# Altium PCB PCA10ControlBoardV1.0.PcbDoc
Units mm, origin at the board's own origin, x right, y up, seen from the top; angles counter-clockwise.
Board outline 43.18 x 54.61 mm, 4 copper layers (Component Side, Ground Plane, Power Plane, Solder Side), stack 0.844 mm thick; 41 components, 31 nets, 179 pads, 204 vias.
Unrouted connection lines stored in the file: 2.
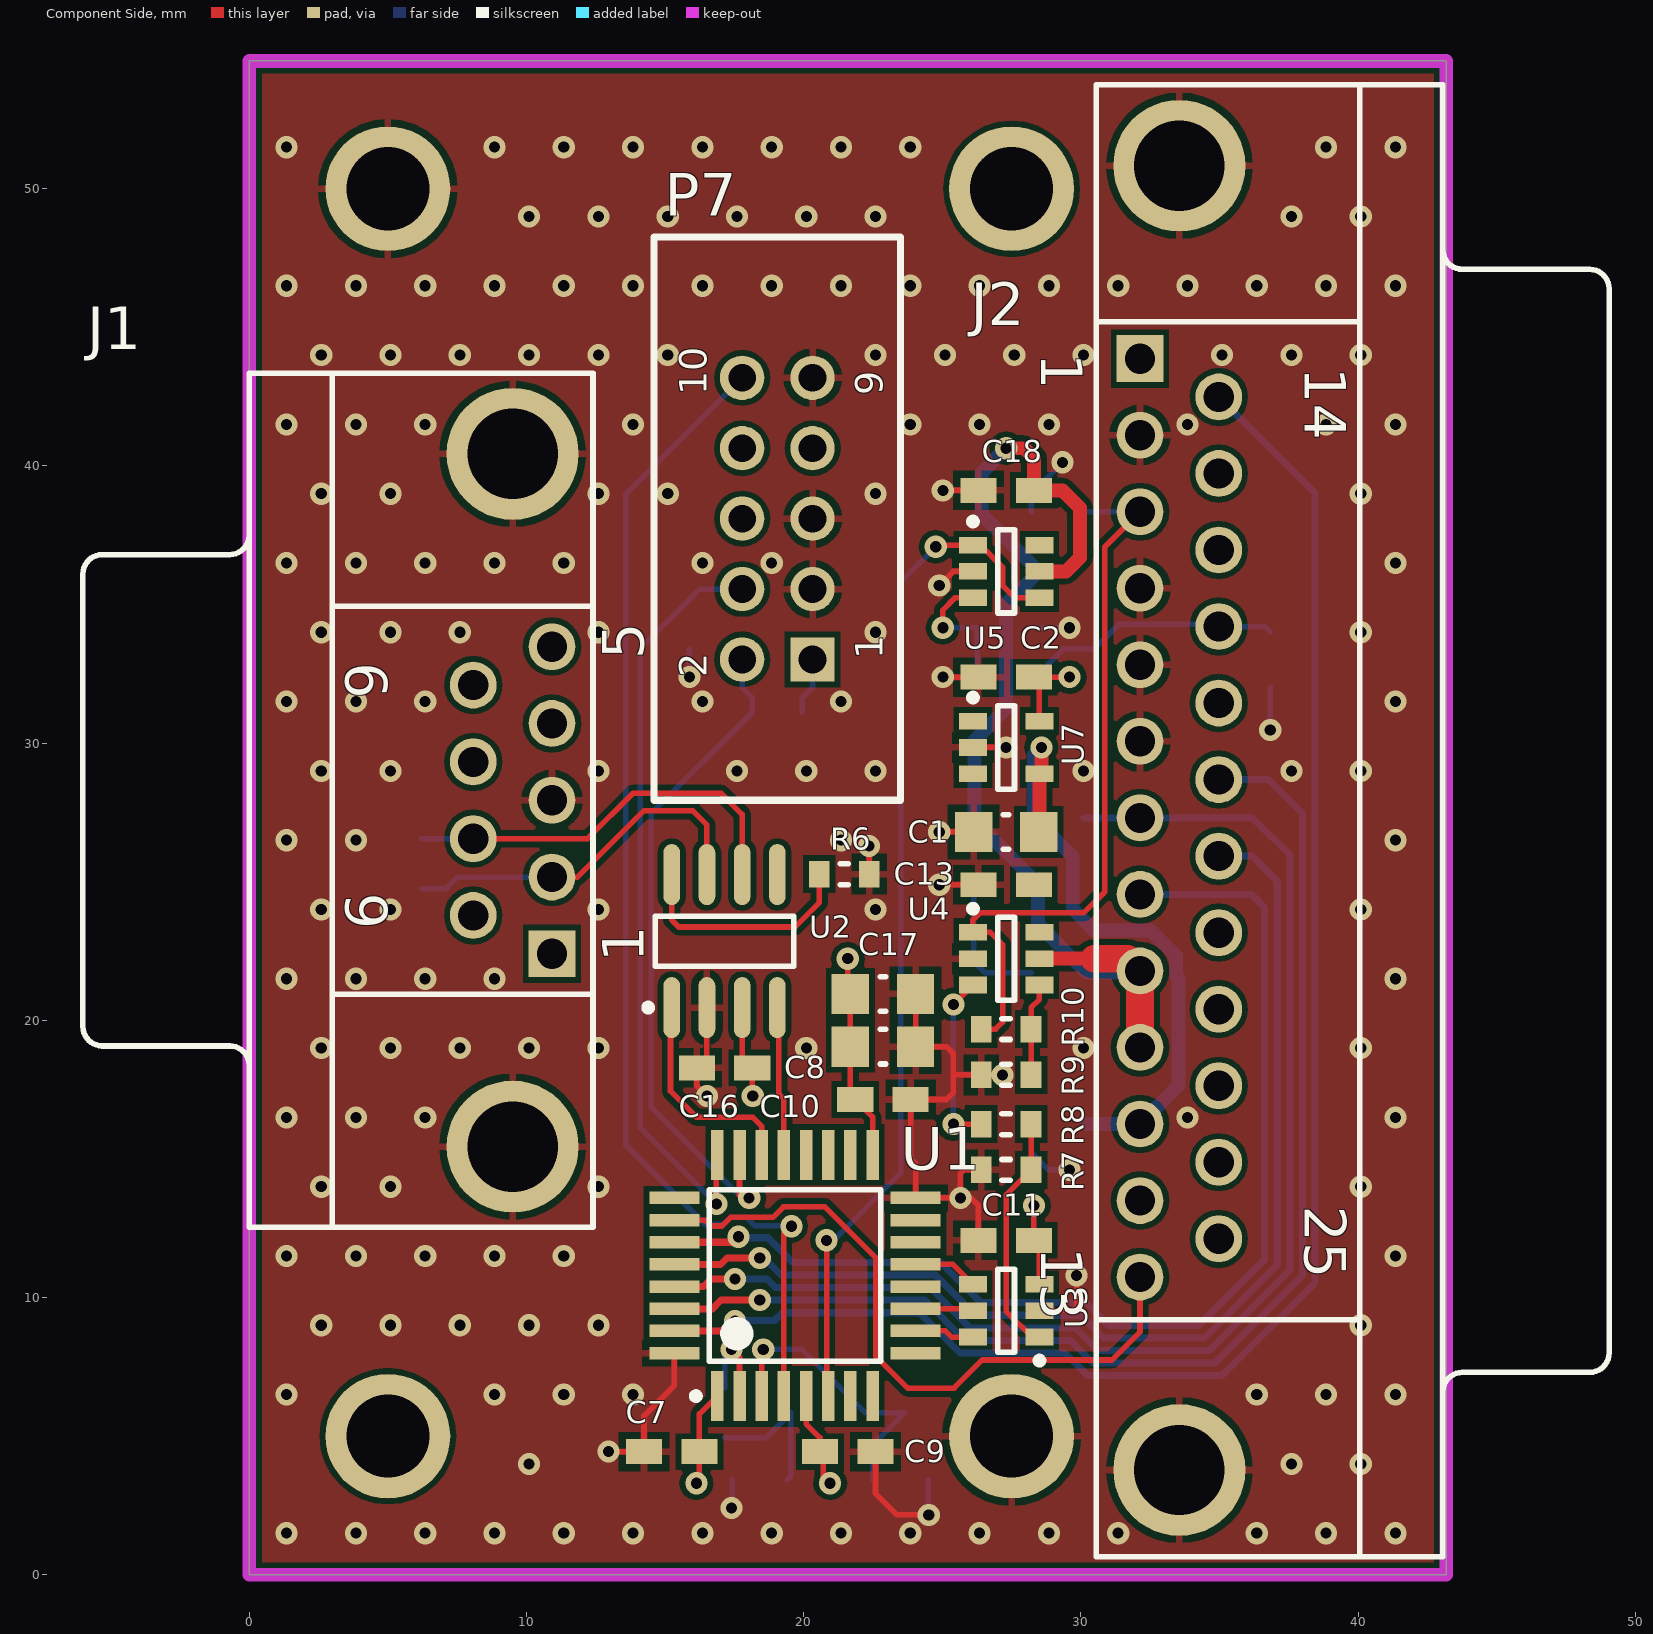
[diagram p0: Component Side view]
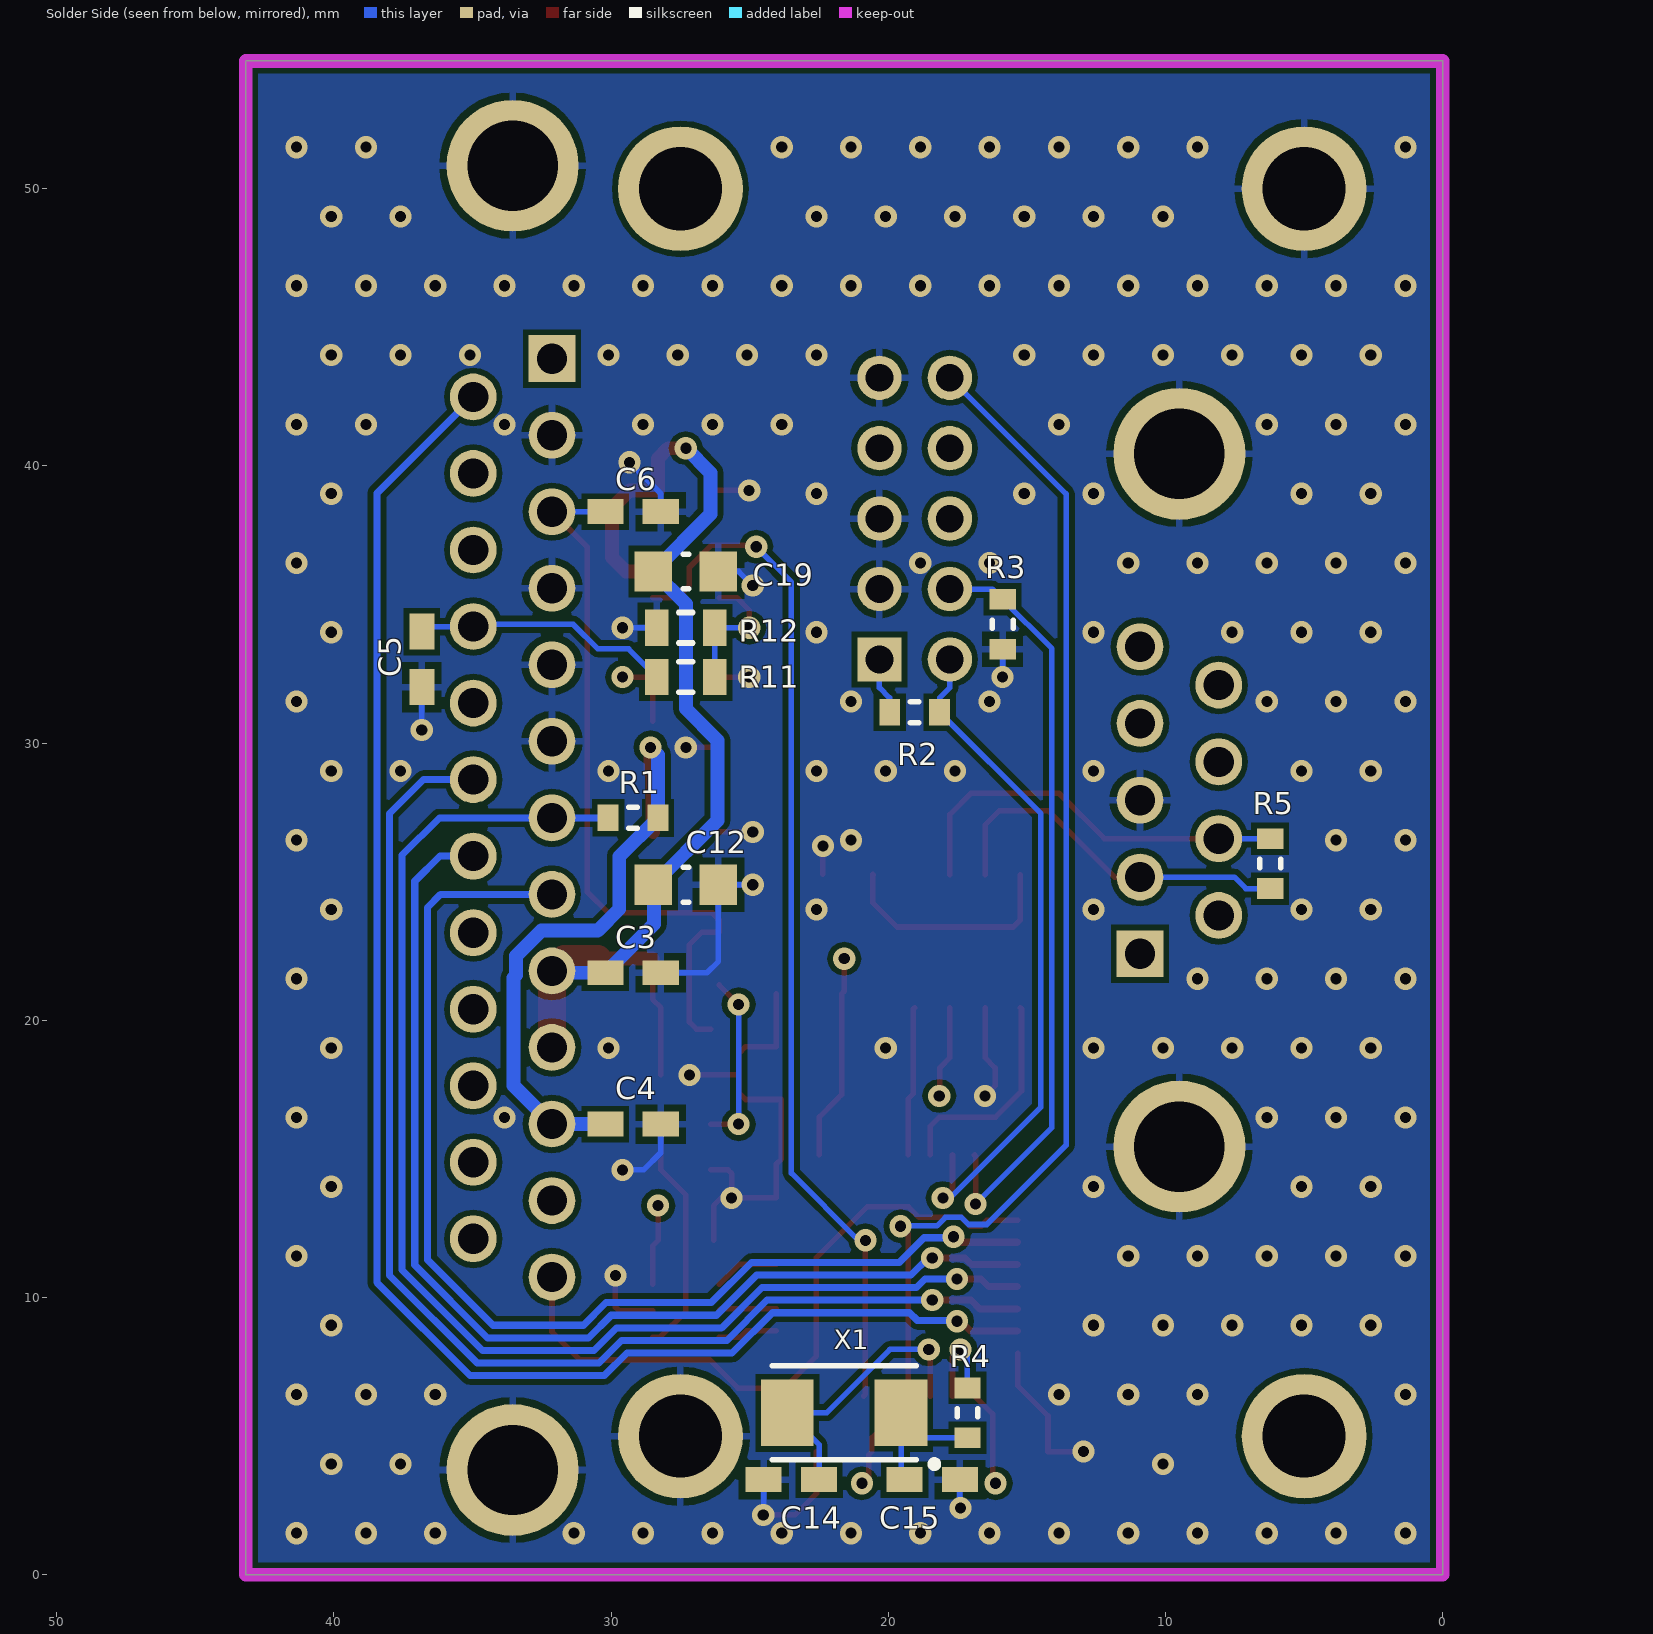
[diagram p1: Solder Side view, seen from below]
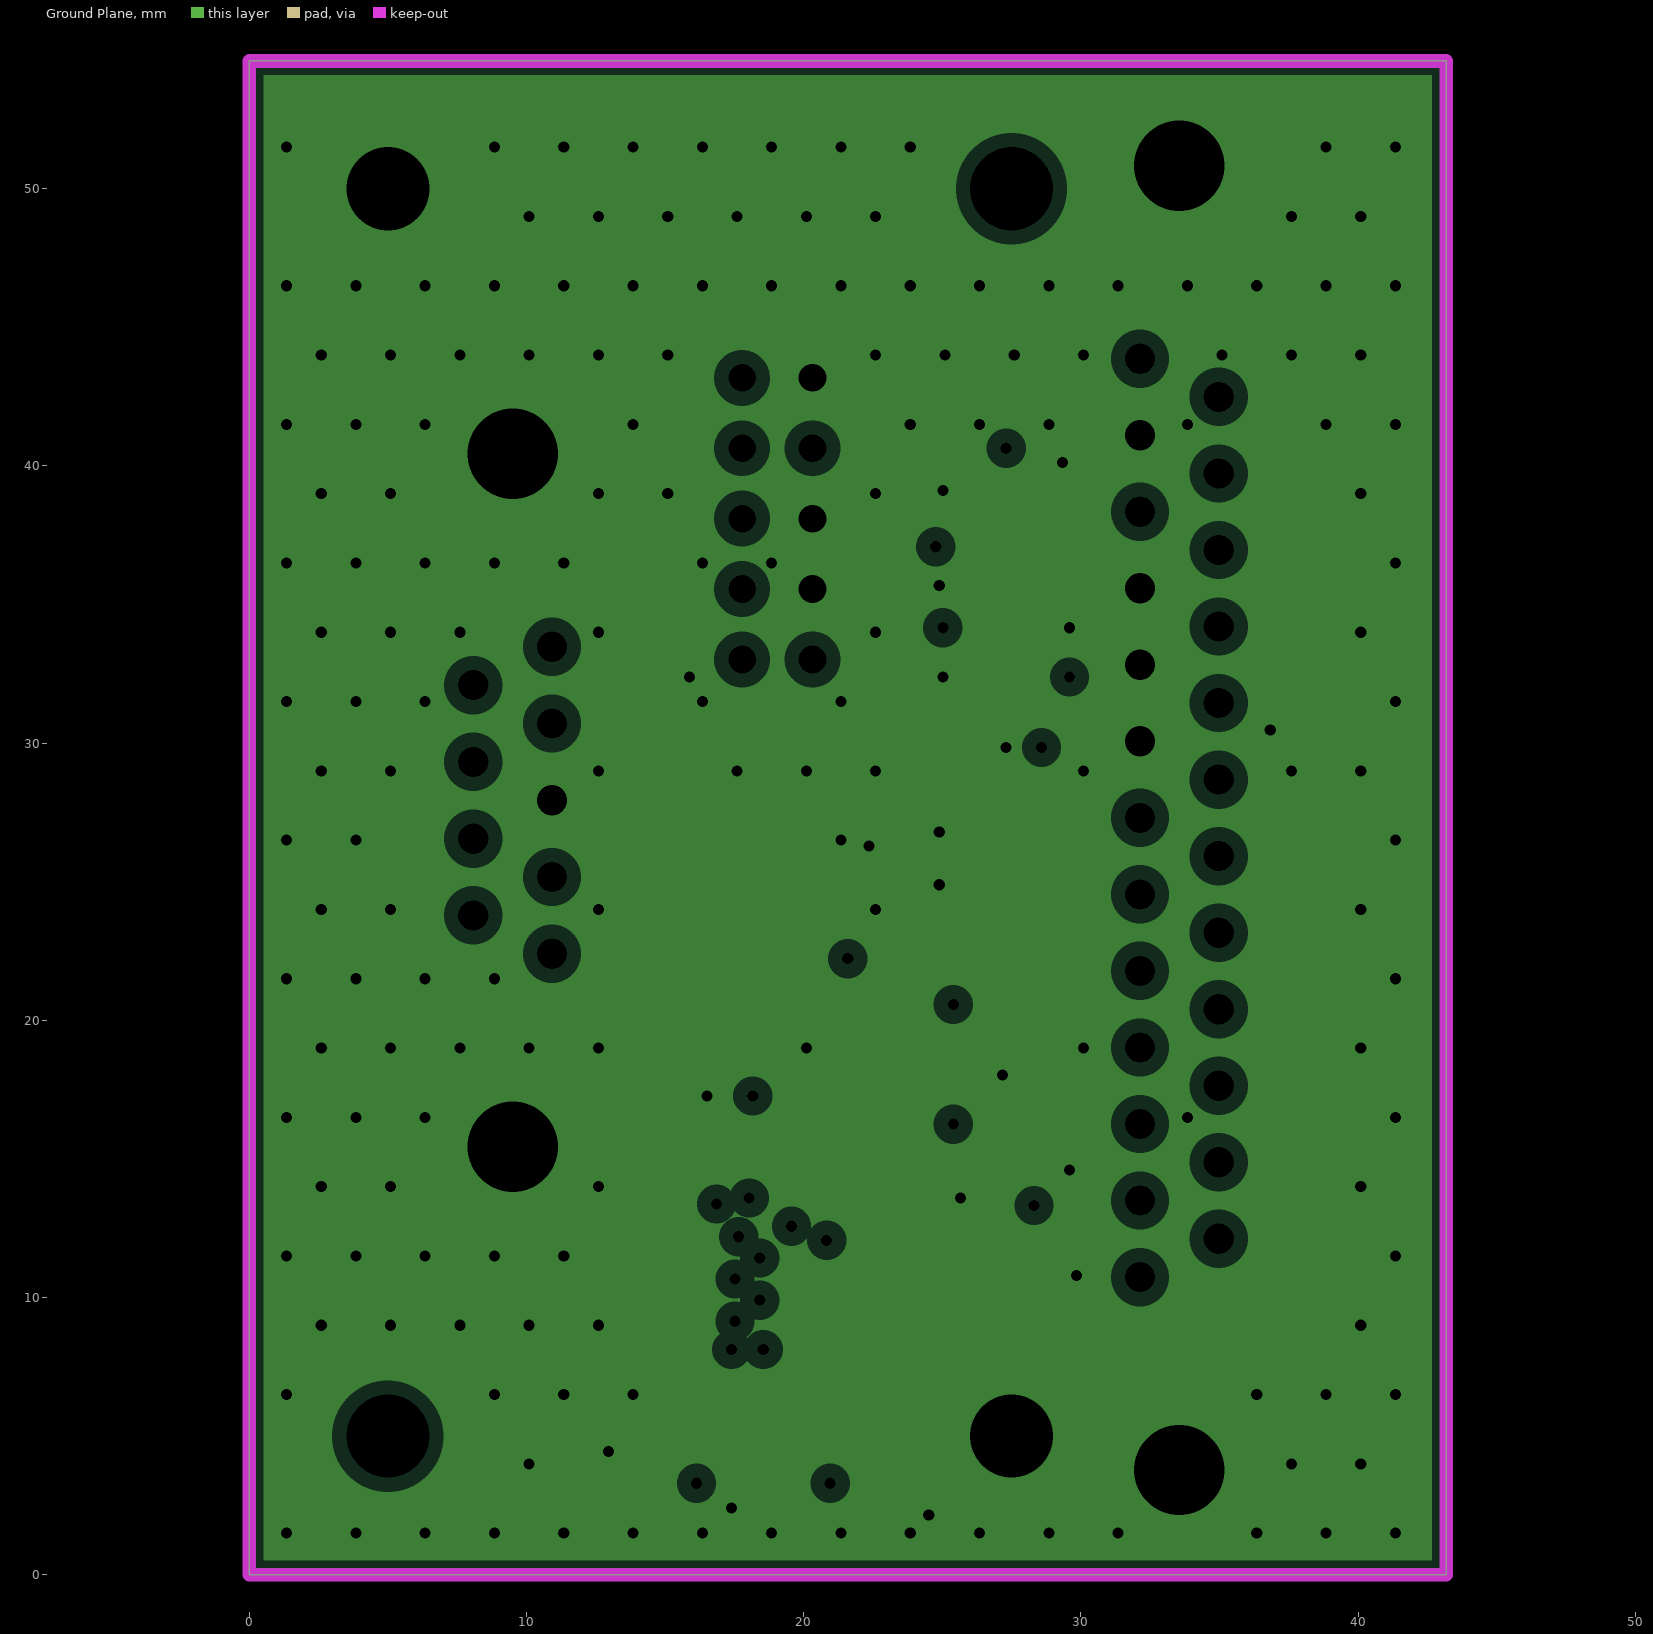
[diagram p2: Ground Plane, clearances drawn from the general rule]
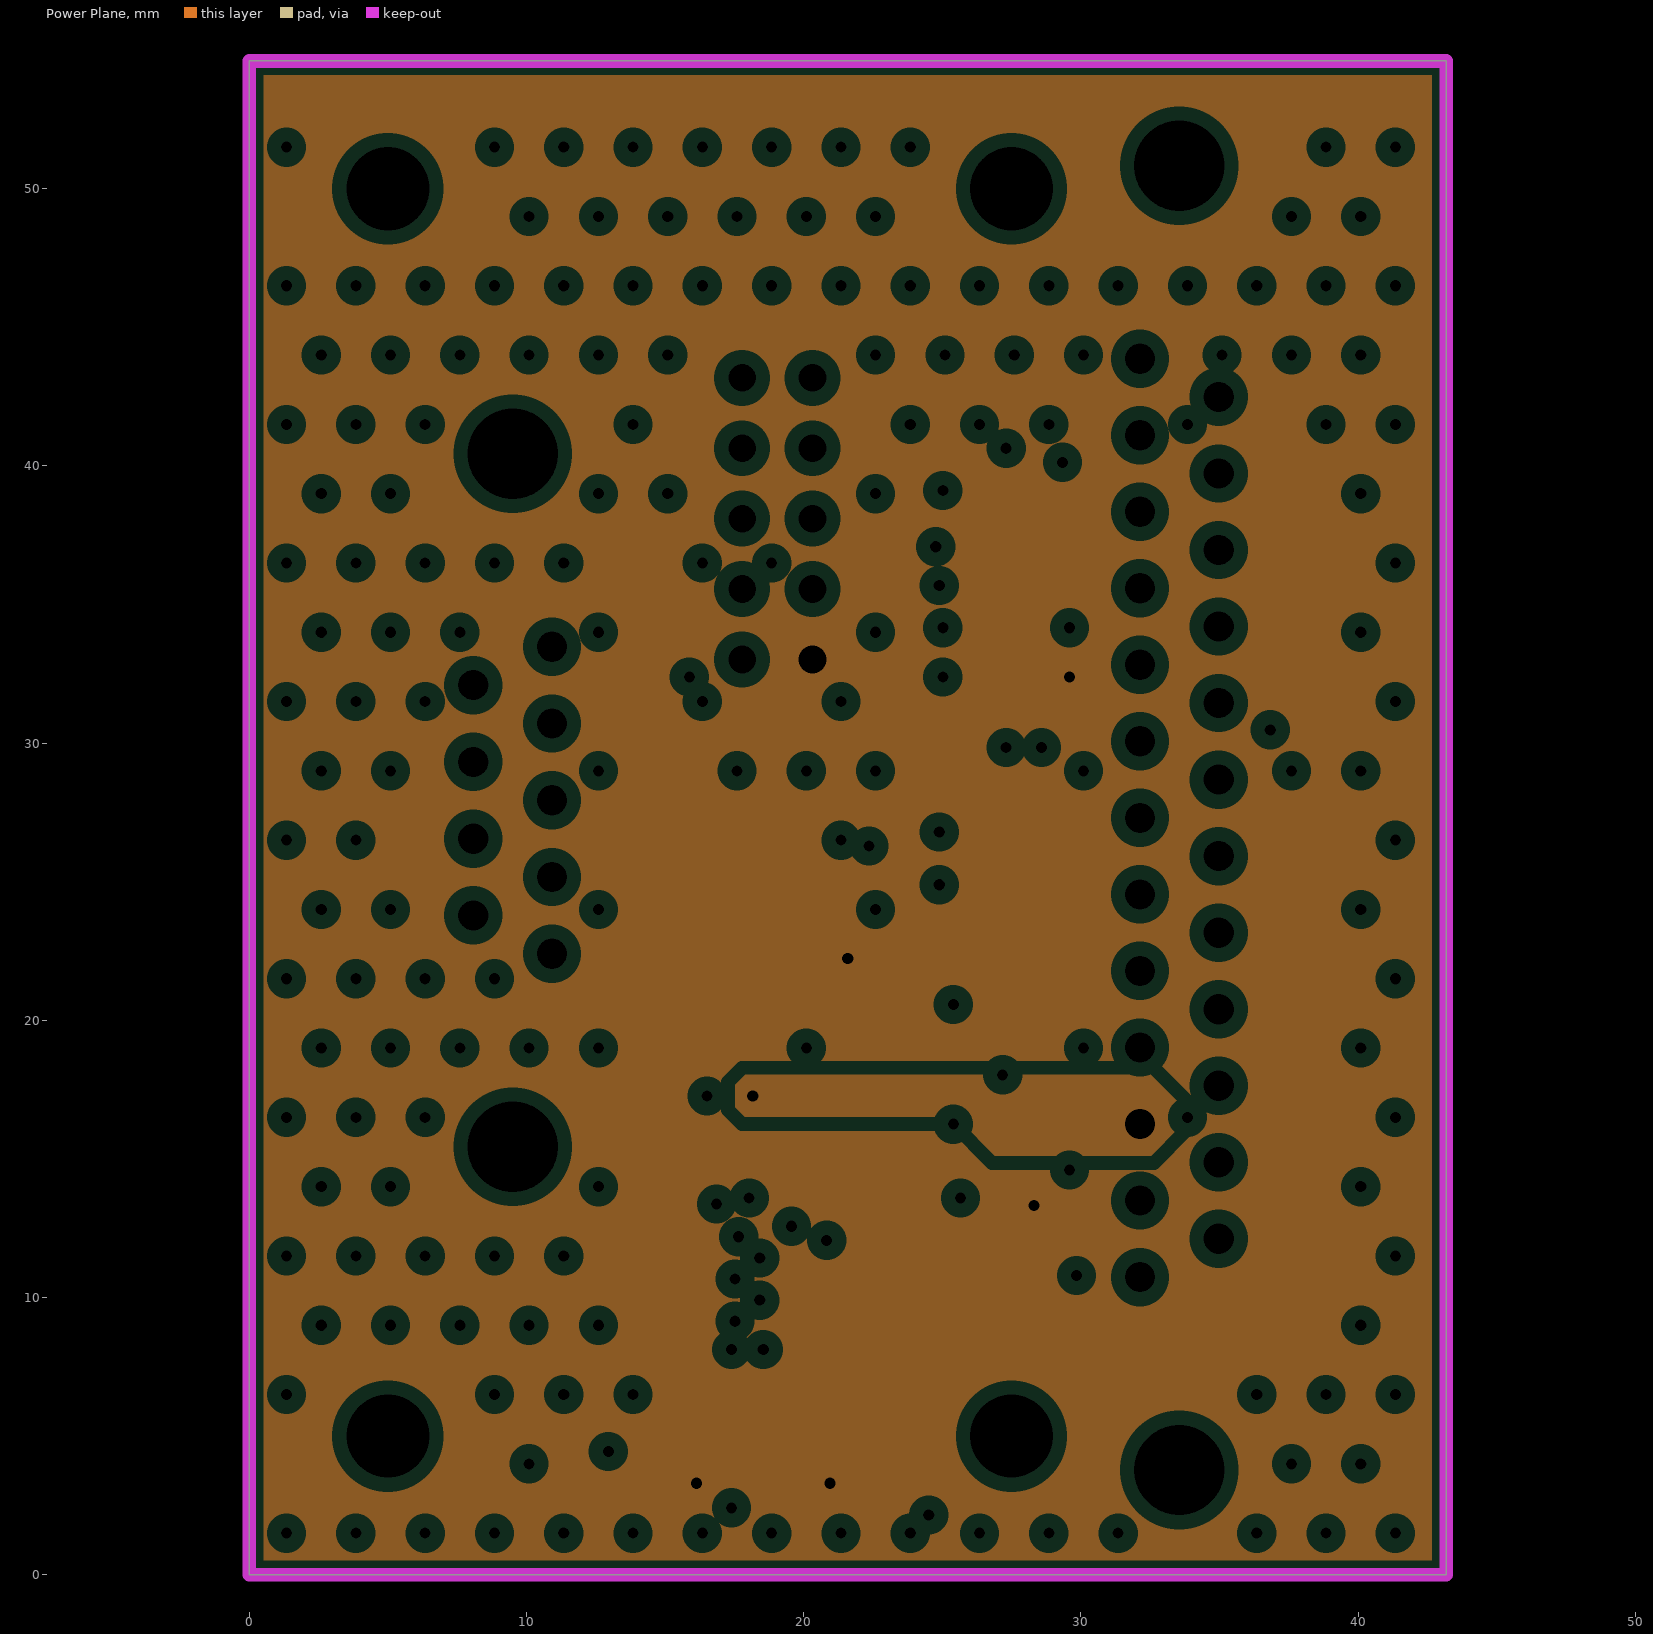
[diagram p3: Power Plane, clearances drawn from the general rule]
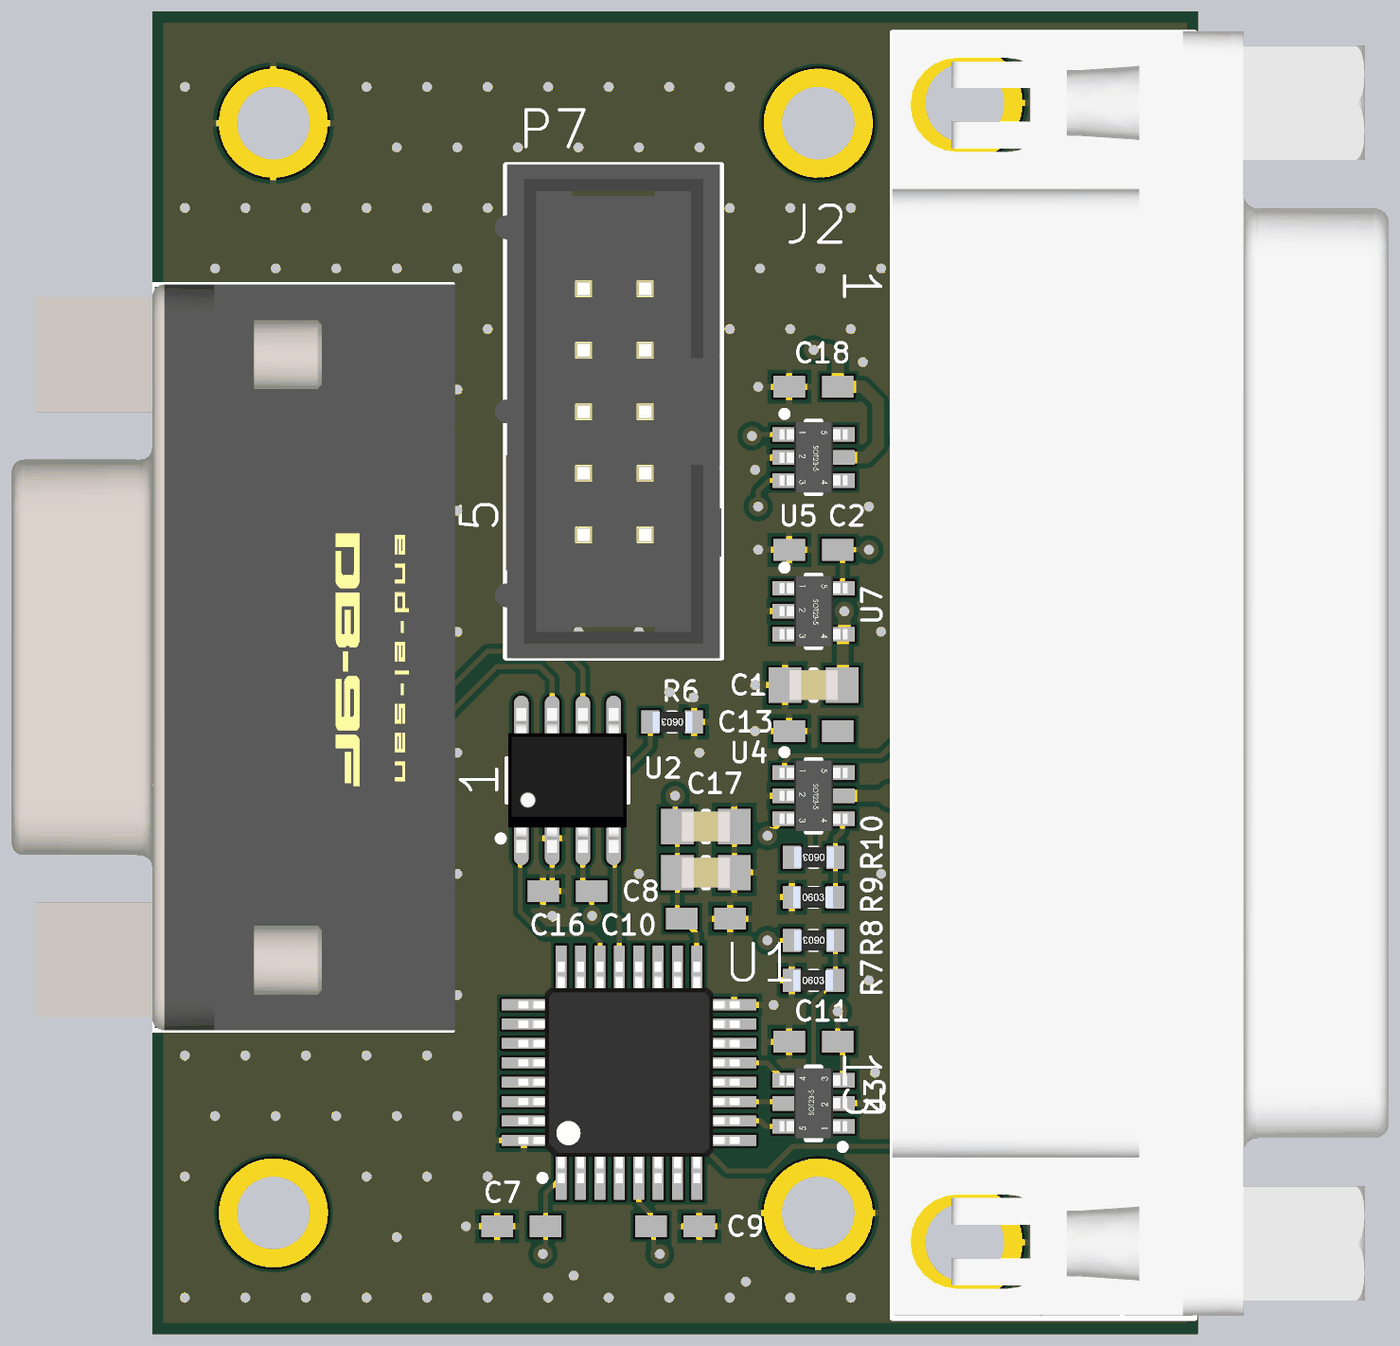
[diagram p4: 3D render of the assembled board from above, using the file's embedded part models]
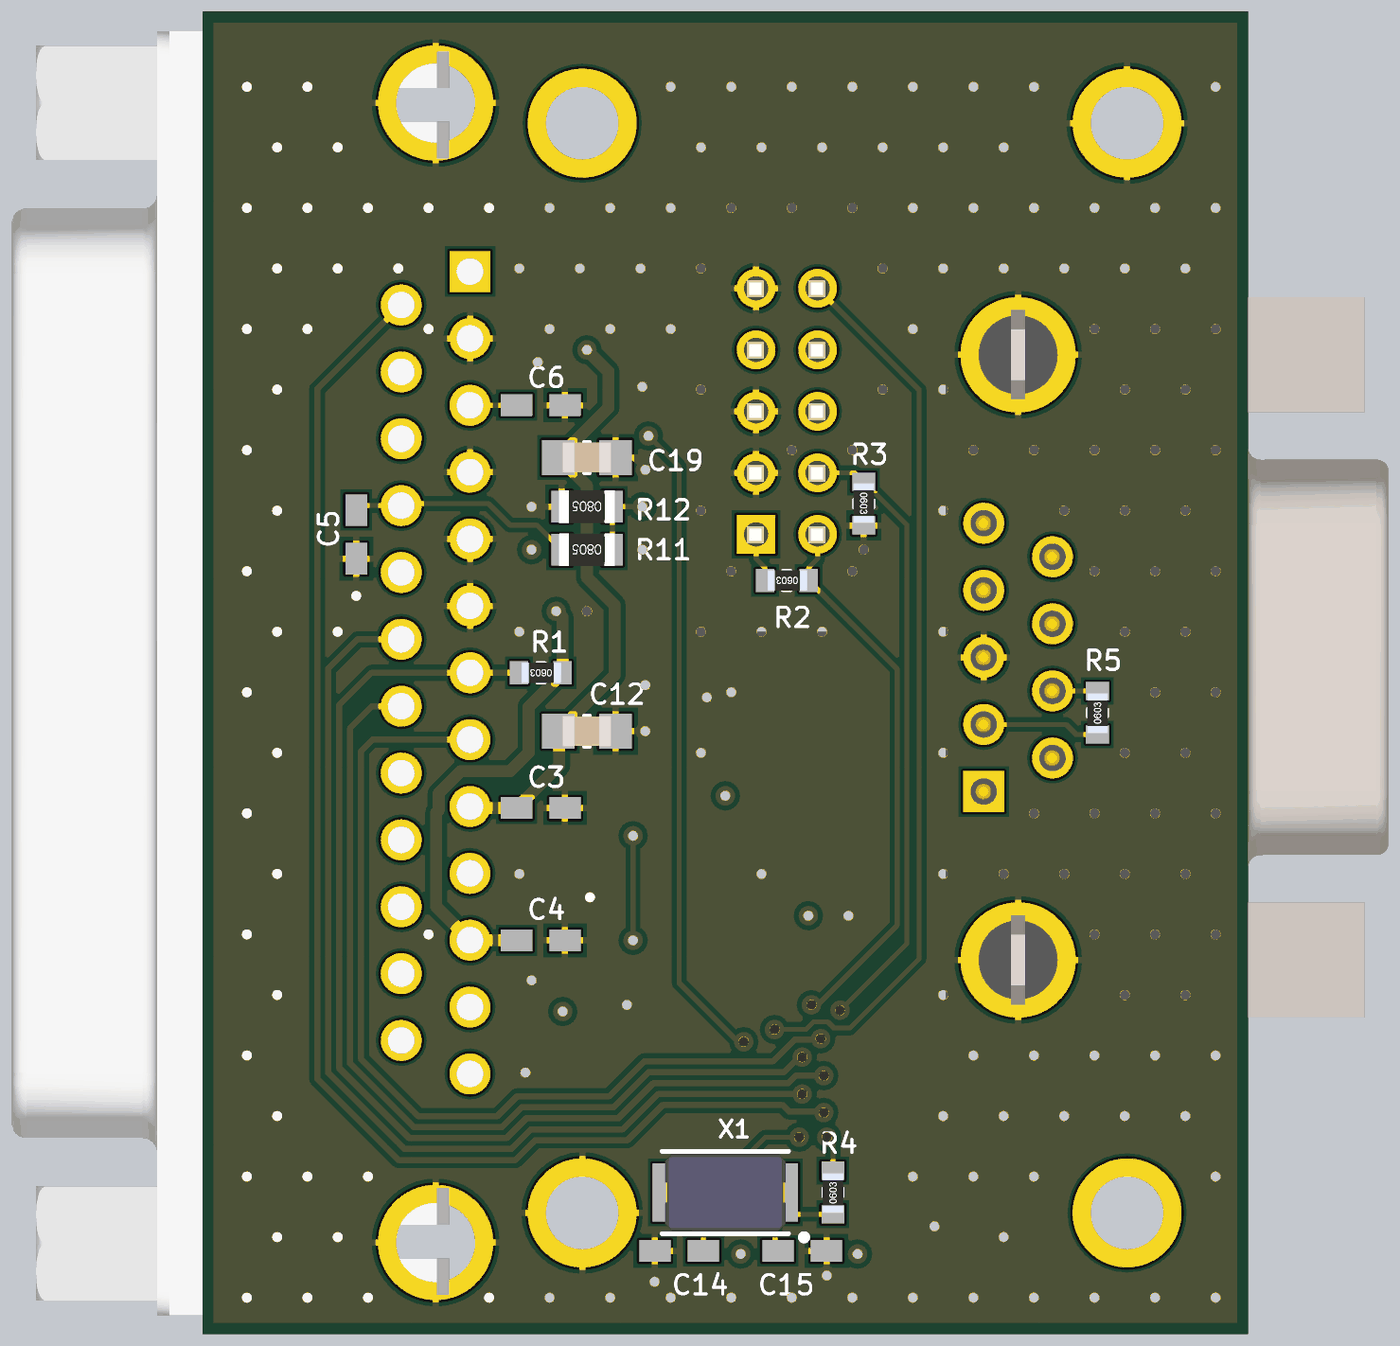
[diagram p5: 3D render of the assembled board from below, using the file's embedded part models]

## Layer stack, top to bottom
Top Solder: solder mask 0.0102, Solder Resist, Dk 3.5
Component Side: signal copper 0.0356
Dielectric 1: core 0.32, FR-4, Dk 4.8
Ground Plane: plane copper 0.036, net GND
Dielectric 3: prepreg 0.127, Dk 4.2
Power Plane: plane copper 0.036, net (Multiple Nets)
Dielectric 4: core 0.254, Dk 4.2
Solder Side: signal copper 0.0356
Bottom Solder: solder mask 0.0102, Solder Resist, Dk 3.5

## Board outline
0,0 43.18,0 43.18,54.61 0,54.61

## Design rules (kind name [scope] priority, off if disabled: settings)
Clearance [All] p1: gap=0.2
PlaneClearance [All] p1: clearance=0.508
PlaneConnect [All] p1: planeconnectstyle=Relief reliefexpansion=0.508 reliefentries=4 reliefconductorwidth=0.254 reliefairgap=0.254
PolygonConnect PolygonDirectConnectVia [All vs IsVia] p1: connectstyle=Direct reliefconductorwidth=0.254 reliefentries=4 polygonreliefangle="90 Angle" airgapwidth=0.254
PolygonConnect [InNet('GND')] p2: connectstyle=Relief reliefconductorwidth=0.254 reliefentries=4 polygonreliefangle="90 Angle" airgapwidth=0.254
RoomDefinition Main [InComponentClass('Main')] p1: confinementstyle=ConfineIn formatcopy=TRUE lockcomponents=FALSE outline -6.35,0 51.435,0 51.435,54.61 -6.35,54.61
RoutingVias [All] p1: holewidth=0.4 width=0.8 viastyle="Through Hole" minholewidth=0.4 minwidth=0.8 maxholewidth=0.711 maxwidth=1.27
SolderMaskExpansion [All] p1: expansion=0.102
Width [All] p1: maxlimit=5 minlimit=0.2 preferedwidth=0.2
28 further rules are at their usual default settings.

## Components (designator, comment, footprint, x,y, rotation, side; value= is the part's Value field where it differs from the comment)
C1 "ChipCap 10u X7R" CAP0805 27.305,26.797 r0 top
C2 "ChipCap 4700 X7R" CAP0603 27.305,32.385 r0 top
C3 "ChipCap 0.1u X7R" CAP0603 29.21,21.717 r0 bottom
C4 "ChipCap 0.1u X7R" CAP0603 29.21,16.256 r0 bottom
C5 "ChipCap 0.1u X7R" CAP0603 36.83,33.02 r270 bottom
C6 "ChipCap 0.1u X7R" CAP0603 29.21,38.354 r180 bottom
C7 "ChipCap 0.1u X7R" CAP0603 15.24,4.445 r0 top
C8 "ChipCap 0.1u X7R" CAP0603 17.145,18.288 r180 top
C9 "ChipCap 0.1u X7R" CAP0603 21.59,4.445 r180 top
C10 "ChipCap 0.1u X7R" CAP0603 22.86,17.145 r180 top
C11 "ChipCap 0.1u X7R" CAP0603 27.305,12.065 r180 top
C12 "ChipCap 1u X7R" CAP0805 27.305,24.892 r0 bottom
C13 "ChipCap 0.1u X7R" CAP0603 27.305,24.892 r0 top
C14 "CAP0603 16pF NP0" CAP0603 18.415,3.429 r0 bottom
C15 "CAP0603 16pF NP0" CAP0603 23.495,3.429 r180 bottom
C16 "ChipCap 1u X7R" CAP0805 22.86,19.05 r180 top
C17 "ChipCap 10u X7R" CAP0805 22.86,20.955 r180 top
C18 "ChipCap 0.1u X7R" CAP0603 27.305,39.116 r0 top
C19 "ChipCap 1u X7R" CAP0805 27.305,36.195 r0 bottom
J1 "D Connector 9" DSUB1.385-2H9F 0,27.94 r90 top
J2 "D Connector 25" DSUB1.385-2H25A-F 43.053,27.305 r270 top
P7 "IDC-10MS (JTAG connector)" IDC-10MS(MR) 19.05,38.1 r90 top
R1 "RES0805 10K 1%" RES0603 29.21,27.305 r0 bottom
R2 "RES0805 10K 1%" RES0603 19.05,31.115 r0 bottom
R3 "RES0805 10K 1%" RES0603 15.875,34.29 r270 bottom
R4 "ChipRes 220R 1%" RES0603 17.145,5.842 r90 bottom
R5 "RES0805 10K 1%" RES0603 6.223,25.654 r90 bottom
R6 "RES0805 10K 1%" RES0603 21.463,25.273 r180 top
R7 "RES0805 47K 1%" RES0603 27.305,14.605 r0 top
R8 "RES0805 5K1 1%" RES0603 27.305,16.256 r180 top
R9 "RES0805 5K1 1%" RES0603 27.305,18.034 r0 top
R10 "RES0805 10K 1%" RES0603 27.305,19.685 r180 top
R11 "RES0805 10K 1%" RES0805 27.305,32.385 r0 bottom
R12 "RES0805 10K 1%" RES0805 27.305,34.163 r0 bottom
U1 "STM32F042K6T6" LQFP32 19.685,10.795 r90 top
U2 "MCP2551" SOIC8 17.145,22.86 r90 top
U3 "AD5320BRTZ" SOT23-6 27.305,9.525 r180 top
U4 "OPA237" SOT23-6 27.305,22.225 r0 top
U5 "OPA237" SOT23-6 27.305,36.195 r0 top
U7 "ST715M33R" SOT23-5 27.305,29.845 r0 top
X1 "XTAL" "ABM3 CERAMIC CRYSTAL" 21.59,5.842 r0 bottom

## Footprints (in the part's own frame and the unit in brackets; to place one, negate y for a bottom-side part, rotate by r counter-clockwise, add the part's x,y. Pads: shape width x height; smd on the part's side, far side on the other; paste and mask are expansions set on the pad)
"ABM3 CERAMIC CRYSTAL" [mm]
  rect 1.9x2.4 smd: 1(-2.05,0) 2(2.05,0)
  silkscreen extent -3.37,-1.7 2.6,1.97, body extent -2.5,-1.6 2.5,1.6, height 1.3
CAP0603 [mm]
  rect 1.3x0.9 smd: 1(-1,0) 2(1,0)
  body extent -1.15,-0.4 1.15,0.4, height 0.55
CAP0805 [mm]
  rect 1.35x1.45 smd: 1(-1.175,0) 2(1.175,0)
  silkscreen extent -0.1,-0.63 0.1,0.63, body extent -1,-0.62 1,0.63, height 0.3
DSUB1.385-2H9F [mm] "Connector; D Subminiature; 9 Position; Right Angle; Pitch 1.385 mm"
  rect 1.69x1.69 hole 1.09: 1(-5.54,-10.92)
  round 1.69 hole 1.09: 2(-2.77,-10.92) 3(0,-10.92) 4(2.77,-10.92) 5(5.54,-10.92) 6(-4.155,-8.08) 7(-1.385,-8.08) 8(1.385,-8.08) 9(4.155,-8.08)
  round 4.76 hole 3.26: 10(-12.495,-9.5) 11(12.495,-9.5)
  silkscreen extent -15.4,-12.4 15.4,6, body extent -15.41,-12.5 15.4,5.8, height 12.56
DSUB1.385-2H25A-F [mm] "Connector; D Subminiature; 25 Position; Right Angle; Pitch 1.385 mm"
  rect 1.69x1.69 hole 1.09: 1(-16.566,-10.92)
  round 1.69 hole 1.09: 2(-13.805,-10.92) 3(-11.044,-10.92) 4(-8.283,-10.92) 5(-5.522,-10.92) 6(-2.761,-10.92) 7(0,-10.92) 8(2.761,-10.92) 9(5.522,-10.92) 10(8.283,-10.92) 11(11.044,-10.92) 12(13.805,-10.92) 13(16.566,-10.92) 14(-15.185,-8.08) 15(-12.424,-8.08) 16(-9.663,-8.08) 17(-6.902,-8.08) 18(-4.141,-8.08) 19(-1.38,-8.08) 20(1.381,-8.08) 21(4.142,-8.08) 22(6.903,-8.08) 23(9.664,-8.08) 24(12.425,-8.08) 25(15.186,-8.08)
  round 4.76 hole 3.26: 26(-23.526,-9.5) 27(23.526,-9.5)
  silkscreen extent -26.44,-12.5 26.66,6, body extent -26.5,-12.5 26.54,8, height 12.56
IDC-10MS(MR) [mm]
  rect 1.6x1.6 hole 1: 1(-5.08,-1.27)
  round 1.6 hole 1: 2(-5.08,1.27) 3(-2.54,-1.27) 4(-2.54,1.27) 5(0,-1.27) 6(0,1.27) 7(2.54,-1.27) 8(2.54,1.27) 9(5.08,-1.27) 10(5.08,1.27)
  silkscreen extent -10.16,-4.45 10.16,4.45, body extent -10.2,-4.45 10.2,4.9, height 9.41
LQFP32 [mm] "LQFP, 32-Leads, Body 7.00x7.00mm, Pitch 0.80mm, IPC Medium Density"
  rect 1.8x0.45 smd: 1(-4.35,2.8) 2(-4.35,2) 3(-4.35,1.2) 4(-4.35,0.4) 5(-4.35,-0.4) 6(-4.35,-1.2) 7(-4.35,-2) 8(-4.35,-2.8) 17(4.35,-2.8) 18(4.35,-2) 19(4.35,-1.2) 20(4.35,-0.4) 21(4.35,0.4) 22(4.35,1.2) 23(4.35,2) 24(4.35,2.8)
  rect 0.45x1.8 smd: 9(-2.8,-4.35) 10(-2,-4.35) 11(-1.2,-4.35) 12(-0.4,-4.35) 13(0.4,-4.35) 14(1.2,-4.35) 15(2,-4.35) 16(2.8,-4.35) 25(2.8,4.35) 26(2,4.35) 27(1.2,4.35) 28(0.4,4.35) 29(-0.4,4.35) 30(-1.2,4.35) 31(-2,4.35) 32(-2.8,4.35)
  silkscreen extent -4.47,-3.1 3.1,3.7, body extent -4.57,-4.57 4.57,4.57, height 1.62
RES0603 [mm] "Chip Resistor, 2-Leads, Body 1.60x0.85mm, IPC Medium Density"
  rect 0.75x0.95 smd: 1(-0.9,0) 2(0.9,0)
  silkscreen extent -0.15,-0.38 0.15,0.38, body extent -0.84,-0.43 0.8,0.42, height 0.46
RES0805 [mm] "Chip Resistor, 2-Leads, Body 2.00x1.27mm, IPC Medium Density"
  rect 0.85x1.3 smd: 1(-1.05,0) 2(1.05,0)
  silkscreen extent -0.25,-0.55 0.25,0.55, body extent -1.15,-0.67 1.15,0.68, height 0.76
SOIC8 [mm] "SOIC, 8-Leads, Body 4,90x3,90mm, Pitch 1,27mm, IPC Medium Density"
  oval 2.2x0.6 smd: 1(-2.4,1.905) 2(-2.4,0.635) 3(-2.4,-0.635) 4(-2.4,-1.905) 5(2.4,-1.905) 6(2.4,-0.635) 7(2.4,0.635) 8(2.4,1.905)
  silkscreen extent -2.52,-2.5 0.9,2.88, body extent -3,-2.45 3,2.45, height 1.61
SOT23-5 [mm] "SOT23, 5-Leads, Body 2.90x2.45mm, Pitch 0.95mm, IPC Medium Density"
  rect 1x0.6 smd: 1(-1.2,0.95) 2(-1.2,0) 3(-1.2,-0.95) 4(1.2,-0.95) 5(1.2,0.95)
  silkscreen extent -1.32,-1.5 0.3,1.92, body extent -1.4,-1.45 1.4,1.45, height 1.24
SOT23-6 [mm] "SOT23, 5-Leads, Body 2.90x2.45mm, Pitch 0.95mm, IPC Medium Density"
  rect 1x0.6 smd: 1(-1.2,0.95) 2(-1.2,0) 3(-1.2,-0.95) 4(1.2,-0.95) 5(1.2,0) 6(1.2,0.95)
  silkscreen extent -1.33,-1.5 0.3,1.92, body extent -1.4,-1.45 1.4,1.45, height 1.24

## Part data
C1 C17: library part "ChipCap 10uF X7R", "Surface-mount ceramic multilayer capacitor"
C2 C14 C15: "Surface-mount ceramic multilayer capacitor"
C3 C4 C5 C6 C7 C8 C9 C10 C11 C13 C18: library part "ChipCap 0.1uF X7R", "Surface-mount ceramic multilayer capacitor"
C12 C16 C19: library part "ChipCap 1uF X7R", "Surface-mount ceramic multilayer capacitor"
J1: "Receptacle Assembly, 9 Position, Right Angle"
J2: "Receptacle Assembly, 25 Position, Right Angle"
R1 R2 R3 R4 R5 R6 R7 R8 R9 R10 R11 R12: "Think Film Chip resistor"
U1: "ARM Cortex-M0 Microcontroller"
U2: library part MCP2551-I/SN, "CAN Transceiver"
U3: library part AD5320BRTZ-500RL7
U4 U5: library part OPA237NA, "Operational Amplifier"
U7: "High input voltage - 85 mA LDO linear regulator"
X1: library part "ABM3 Ceramic SMD Crystal", "Quartz crystall oscillator"

## Free pads (board coordinates)
  round 4.5 hole 3 unplated: 1(5,5) 1(5,50) 1(27.5,5) 1(27.5,50)

## Via types
v1: diameter 0.8, hole 0.4, Component Side to Solder Side, tented both sides, 204 vias

## Nets (pads, with @x,y where several pads share a name; then routed paths per layer and width w, separated by ;. In a path a pad name is that pad's centre, name@x,y a point inside that pad or via, vN(x,y) a via of type N, cw(c..) or ccw(c..) an arc to the next point about the centre after c; other vN are vias at no path point)
+3V3: C2.2 C7.2 C9.2 C10.2 C11.1 C16.2 C17.2 P7.1 R2.2 U1.1 U1.5 U1.17 U3.3 U7.5 | length 22.5
  Component Side w0.2: v1(16.129,3.302) 16.24,3.413 C7.2 16.24,5.8 U1.1 ; U1.5 20.085,5.442 20.59,4.937 C9.2 20.701,4.334 20.701,3.457 20.856,3.302 v1(20.955,3.302) ; v1(21.59,22.225) 21.59,21.05 C17.2 C16.2 21.685,17.32 C10.2 22.485,16.52 U1.17 ; v1(28.305,13.319) C11.1 28.505,11.865 U3.3 ; U7.5 28.505,32.185 C2.2 v1(29.591,32.385)
  Solder Side w0.2: v1@16.129,3.175 v1(16.129,3.302) ; R2.2 19.95,31.634 20.32,32.004 P7.1
+5V: C1.2 C4.2 C8.1 J2.11 R1.1 U2.3 U7.4 | length 26.2
  Component Side w0.2: U2.3 17.78,18.653 C8.1 18.145,17.161 18.161,17.177 v1(18.161,17.272)
  Component Side w0.5: C1.2 28.505,26.822 U7.4 28.575,28.965 v1(28.575,29.845)
  Solder Side w0.5: v1(28.575,29.845) 28.31,29.58 R1.1 29.707,25.908 29.707,24.014 30.48,23.241 32.506,23.241 33.428,22.319 33.428,21.628 33.528,21.528 33.528,17.656 J2.11 30.215,16.261 C4.2
+15V: C3.2 C12.2 C13.2 C18.2 C19.2 J2.9 J2.10 U4.5 U5.5 | length 39
  Component Side w0.5: v1(27.305,40.64) 27.94,40.64 28.305,40.275 C18.2 29.337,39.116 29.972,38.481 29.972,36.703 29.464,36.195 U5.5 ; U4.5 30.48,22.225
  Component Side w1: 30.48,22.225 31.691,22.225 J2.9 J2.10
  Solder Side w0.5: v1(27.305,40.64) 26.416,39.751 26.416,38.259 C19.2 27.305,35.02 27.305,31.242 26.162,30.099 26.162,27.21 C12.2 ; C12.2@28.448,24.892 28.448,23.479 C3.2 32.067,21.717 J2.9
ADC_IN: U1.6 U5.1 U5.4 | length 37.4
  Component Side w0.2: v1(20.828,12.065) 20.828,6.502 U1.6 ; v1(24.765,37.084) 24.826,37.145 U5.1 26.379,37.145 27.178,36.346 27.178,35.687 27.62,35.245 U5.4
  Solder Side w0.2: v1(20.828,12.065) 21.069,12.065 23.495,14.491 23.495,35.814 v1(24.765,37.084)
CAN_RX: U1.21 U2.4 | length 5.4
  Component Side w0.2: U2.4 19.095,20.415 19.095,17.354 19.285,17.164 U1.21
CAN_TX: U1.22 U2.1 | length 7.9
  Component Side w0.2: U2.1 15.195,20.415 15.195,17.444 16.129,16.51 18.161,16.51 18.485,16.186 U1.22
DAC_MOSI: U1.13 U3.4 | length 2.4
  Component Side w0.2: U1.13 25.385,11.195 U3.4
DAC_NSYNC: U1.10 U3.6 | length 2.2
  Component Side w0.2: U1.10 25.114,8.795 25.334,8.575 U3.6
DAC_SCK: U1.11 U3.5 | length 2.1
  Component Side w0.2: U1.11 26.035,9.595 U3.5
FAULT: J2.19 U1.30 | length 45.2
  Component Side w0.254: U1.30 16.707,9.595 17.018,9.906 v1(18.415,9.906)
  Solder Side w0.254: v1(18.415,9.906) 24.37,9.906 25.822,8.454 29.62,8.454 30.436,7.638 34.83,7.638 37.992,10.8 37.992,27.467 36.774,28.685 J2.19
GND: C1.1 C2.1 C3.1 C4.1 C5.2 C6.2 C7.1 C8.2 C9.1 C10.1 C11.2 C12.1 C13.1 C14.1 C15.1 C16.1 C17.1 C18.1 C19.1 J1.3 J1.10 J1.11 J2.2 J2.4 J2.5 J2.6 J2.26 J2.27 P7.3 P7.5 P7.9 pad.1@5,50 pad.1@27.5,5 R3.2 R6.1 R7.1 R9.1 R12.2 U1.16 U1.32 U2.2 U3.2 U4.2 U5.2 U7.2 | length 59.8
  Component Side w0.2: v1(12.954,4.445) C7.1 14.24,5.731 15.335,6.826 U1.32 ; v1(16.51,17.272) 16.145,17.637 C8.2 16.51,18.653 U2.2 ; v1(22.352,26.289) 22.363,26.278 R6.1 ; C9.1 22.59,2.937 23.368,2.159 v1(24.511,2.159) ; C17.1 C16.1 25.146,19.05 25.4,18.796 25.4,18.034 ; v1(24.892,24.892) C13.1 ; v1(24.892,26.797) C1.1 ; v1(24.892,35.687) 25.4,36.195 U5.2 ; v1(25.019,32.385) C2.1 ; v1(25.019,39.116) C18.1 ; v1(25.654,13.589) 26.035,13.589 26.305,13.319 C11.2 ; U7.2 v1(27.305,29.845) ; R7.1 25.781,14.605 25.648,14.472 25.648,13.595 U1.16 24.035,14.827 23.86,15.002 C10.1 25.146,17.145 25.4,17.399 25.4,18.034 ; v1(27.178,18.034) R9.1 25.4,18.034 ; U3.2 29.718,9.525 29.845,9.652 v1(29.845,10.795)
  Solder Side w0.2: v1(15.875,32.385) R3.2 ; v1(17.399,2.413) 17.415,2.429 C14.1 ; C15.1 24.495,2.175 v1(24.511,2.159) ; v1(24.892,24.892) C12.1 26.13,22.13 26.543,21.717 C3.1 ; v1(24.892,35.687) 25.4,36.195 C19.1 ; C4.1 28.21,15.224 28.829,14.605 v1(29.591,14.605) ; C6.2 28.21,39.005 v1(29.337,40.132) ; R12.2 v1(29.591,34.163) ; v1(36.83,30.48) C5.2
  other v1: 1.345,1.5 3.845,1.5 6.345,1.5 8.845,1.5 11.345,1.5 13.845,1.5 16.345,1.5 18.845,1.5 21.345,1.5 23.845,1.5 26.345,1.5 28.845,1.5 31.345,1.5 36.345,1.5 38.845,1.5 41.345,1.5 10.095,4 37.595,4 40.095,4 1.345,6.5 8.845,6.5 11.345,6.5 13.845,6.5 36.345,6.5 38.845,6.5 41.345,6.5 2.595,9 5.095,9 7.595,9 10.095,9 12.595,9 40.095,9 1.345,11.5 3.845,11.5 6.345,11.5 8.845,11.5 11.345,11.5 41.345,11.5 2.595,14 5.095,14 12.595,14 40.095,14 1.345,16.5 3.845,16.5 6.345,16.5 33.845,16.5 41.345,16.5 2.595,19 5.095,19 7.595,19 10.095,19 12.595,19 20.095,19 30.095,19 40.095,19 1.345,21.5 3.845,21.5 6.345,21.5 8.845,21.5 41.345,21.5 2.595,24 5.095,24 12.595,24 22.595,24 40.095,24 1.345,26.5 3.845,26.5 21.345,26.5 41.345,26.5 2.595,29 5.095,29 12.595,29 17.595,29 20.095,29 22.595,29 30.095,29 37.595,29 40.095,29 1.345,31.5 3.845,31.5 6.345,31.5 16.345,31.5 21.345,31.5 41.345,31.5 2.595,34 5.095,34 7.595,34 12.595,34 22.595,34 40.095,34 1.345,36.5 3.845,36.5 6.345,36.5 8.845,36.5 11.345,36.5 16.345,36.5 18.845,36.5 41.345,36.5 2.595,39 5.095,39 12.595,39 15.095,39 22.595,39 40.095,39 1.345,41.5 3.845,41.5 6.345,41.5 13.845,41.5 23.845,41.5 26.345,41.5 28.845,41.5 33.845,41.5 38.845,41.5 41.345,41.5 2.595,44 5.095,44 7.595,44 10.095,44 12.595,44 15.095,44 22.595,44 25.095,44 27.595,44 30.095,44 35.095,44 37.595,44 40.095,44 1.345,46.5 3.845,46.5 6.345,46.5 8.845,46.5 11.345,46.5 13.845,46.5 16.345,46.5 18.845,46.5 21.345,46.5 23.845,46.5 26.345,46.5 28.845,46.5 31.345,46.5 33.845,46.5 36.345,46.5 38.845,46.5 41.345,46.5 10.095,49 12.595,49 15.095,49 17.595,49 20.095,49 22.595,49 37.595,49 40.095,49 1.345,51.5 8.845,51.5 11.345,51.5 13.845,51.5 16.345,51.5 18.845,51.5 21.345,51.5 23.845,51.5 38.845,51.5 41.345,51.5
HV_ON: J2.20 U1.28 | length 40.5
  Component Side w0.254: U1.28 16.999,11.195 17.234,11.43 v1(18.415,11.43)
  Solder Side w0.254: v1(18.415,11.43) 18.561,11.43 19.177,10.814 24.746,10.814 26.198,9.362 29.996,9.362 30.812,8.546 34.454,8.546 37.084,11.176 37.084,25.019 36.179,25.924 J2.20
INHIBIT: J2.7 R1.2 U1.29 | length 47.5
  Component Side w0.254: U1.29 16.385,10.395 16.658,10.668 v1(17.526,10.668)
  Solder Side w0.254: v1(17.526,10.668) 18.681,10.668 18.989,10.36 24.558,10.36 26.01,8.908 29.808,8.908 30.624,8.092 34.642,8.092 37.538,10.988 37.538,25.962 36.195,27.305 J2.7 R1.2
NetC14_2: C14.2 R4.1 X1.1 | length 5.2
  Solder Side w0.2: R4.1 18.64,4.942 X1.1 19.54,3.554 C14.2
NetC15_2: C15.2 U1.3 X1.2 | length 10.6
  Component Side w0.2: U1.3 18.485,8.071 v1(18.542,8.128)
  Solder Side w0.2: v1(18.542,8.128) 19.939,8.128 22.225,5.842 X1.2 22.495,4.697 C15.2
NetJ1_2: J1.2 R5.1 U2.7 | length 13.5
  Component Side w0.2: J1.2 11.835,25.17 14.224,27.559 16.002,27.559 16.51,27.051 U2.7
  Solder Side w0.2: R5.1 7.101,24.754 7.517,25.17 J1.2
NetJ1_7: J1.7 R5.2 U2.6 | length 14.7
  Component Side w0.2: J1.7 12.204,26.555 13.843,28.194 17.018,28.194 17.78,27.432 U2.6
  Solder Side w0.2: R5.2 6.224,26.555 J1.7
NetR4_2: R4.2 U1.2 | length 3.3
  Component Side w0.2: v1(17.399,8.128) 17.685,7.842 U1.2
  Solder Side w0.2: R4.2 17.145,7.874 v1(17.399,8.128)
NetR6_2: R6.2 U2.8 | length 8.5
  Component Side w0.2: U2.8 15.24,23.622 15.494,23.368 19.685,23.368 20.563,24.246 R6.2 R6.2@20.55,25.26
NetR7_2: R7.2 R8.1 U3.1 | length 8.7
  Component Side w0.2: R8.1 R7.2 27.305,13.705 27.305,9.501 28.231,8.575 U3.1
NetR8_2: R8.2 U4.3 | length 6.3
  Component Side w0.2: v1(25.4,16.256) R8.2 ; v1(25.4,20.574) 26.101,21.275 U4.3
  Solder Side w0.2: v1(25.4,16.256) v1(25.4,20.574)
NetR9_2: R9.2 R10.1 U4.4 | length 3.4
  Component Side w0.2: R9.2 R10.1 28.205,20.458 28.505,20.758 U4.4
NetR11_1: R11.1 R12.1 U5.3 | length 4.9
  Component Side w0.2: v1(25.019,34.163) 25.019,34.798 25.466,35.245 U5.3
  Solder Side w0.2: v1(25.019,34.163) R12.1 R11.1
NRESET: P7.10 U1.4 | length 43.1
  Component Side w0.2: U1.4 19.285,12.3 v1(19.558,12.573)
  Solder Side w0.2: P7.10 13.589,38.989 13.589,15.494 16.448,12.635 17.106,12.635 17.363,12.892 17.943,12.892 18.251,12.584 19.547,12.584 v1(19.558,12.573)
OVER_TEMPERATURE: J2.13 U1.26 | length 24.8
  Component Side w0.2: U1.26 16.441,12.795 16.655,12.581 17.052,12.581 17.363,12.892 17.943,12.892 18.887,12.892 19.268,13.273 20.763,13.273 22.606,11.43 22.606,7.874 23.749,6.731 25.423,6.731 26.439,7.747 31.115,7.747 32.133,8.765 J2.13
OVER_VOLT: J2.14 U1.31 | length 59.3
  Component Side w0.254: U1.31 17.038,8.795 17.514,9.271 17.526,9.259 v1(17.526,9.144)
  Solder Side w0.254: v1(17.526,9.144) 17.561,9.179 18.958,9.179 19.231,9.452 24.182,9.452 25.634,8 29.432,8 30.248,7.184 35.095,7.184 38.446,10.535 38.446,39.017 J2.14
PCA10_VMON: C5.1 J2.17 R11.2 | length 9.4
  Solder Side w0.2: R11.2 29.371,33.401 30.48,33.401 31.369,34.29 34.89,34.29 J2.17 36.643,34.207 C5.1
PCA10_VPROG: C6.1 J2.3 R10.2 U4.1 | length 26.7
  Component Side w0.2: R10.2 26.924,19.685 27.178,19.939 27.178,22.733 26.736,23.175 U4.1 26.105,23.622 26.359,23.876 30.099,23.876 30.861,24.638 30.861,37.077 J2.3
  Solder Side w0.2: C6.1 30.215,38.349 J2.3
READY: J2.8 U1.27 | length 41.4
  Component Side w0.254: U1.27 17.723,11.995 17.663,11.935 17.653,11.945 v1(17.653,12.192)
  Solder Side w0.254: v1(17.653,12.192) 17.688,12.157 18.716,12.157 19.605,11.268 24.934,11.268 26.386,9.816 30.184,9.816 31,9 34.266,9 36.63,11.364 36.63,24.076 36.162,24.544 J2.8
SWDCLK: P7.4 R3.1 U1.24 | length 27.5
  Component Side w0.2: v1(16.854,13.372) 16.854,15.102 16.891,15.139 U1.24
  Solder Side w0.2: v1(16.854,13.372) 14.097,16.129 14.097,33.412 R3.1 16.245,35.56 P7.4
SWDIO: P7.2 R2.1 U1.23 | length 24.6
  Component Side w0.2: U1.23 17.685,13.684 17.777,13.592 v1(18.034,13.592)
  Solder Side w0.2: P7.2 17.78,32.004 18.15,31.634 R2.1 14.497,27.462 14.497,16.872 17.777,13.592 v1(18.034,13.592)
pads on no net: J1.1 J1.4 J1.5 J1.6 J1.8 J1.9 J2.1 J2.12 J2.15 J2.16 J2.18 J2.21 J2.22 J2.23 J2.24 J2.25 P7.6 P7.7 P7.8 U1.7 U1.8 U1.9 U1.12 U1.14 U1.15 U1.18 U1.19 U1.20 U1.25 U2.5 U4.6 U5.6 U7.1 U7.3

## Polygon pours and split planes (outlines as drawn)
GND on Component Side "Keep-Out Layer-No Net" (solid, pour order 2): 0,0 43.18,0 43.18,54.61 0,54.61
GND on Solder Side "Keep-Out Layer-No Net 1" (solid, pour order 3): 0,0 43.18,0 43.18,54.61 0,54.61
+5V on Power Plane (split plane): 33.53,17.041 33.53,16.106 32.535,15.111 26.901,15.111 25.578,16.434 25.526,16.474 25.465,16.5 25.4,16.508 17.884,16.508 17.524,16.868 17.524,17.676 17.884,18.036 32.535,18.036
+3V3 on Power Plane (split plane): 42.67,0.51 0.51,0.51 0.51,54.1 42.67,54.1
GND on Ground Plane (split plane): 42.67,0.51 0.51,0.51 0.51,54.1 42.67,54.1

## Keep-outs
Keep-Out Layer:
  the board outline again, w0.5

## Other copper
Power Plane (plane layer: these items are gaps in the copper):
  lines w0.5: 17.272,16.764 17.78,16.256 25.4,16.256 26.797,14.859 32.639,14.859 33.782,16.002 33.782,17.145 32.639,18.288 23.114,18.288 17.78,18.288 17.272,17.78 17.272,16.764

## Dimensions
43.18,54.61 to 0,54.61 on Keep-Out Layer
0,54.61 to 43.18,0 on Keep-Out Layer

## Text inside footprints (layer, text, board x,y; h text height)
J1: Mechanical 13 "6" at 4.975,23.285 h1.5 r90; Mechanical 13 "9" at 4.975,31.595 h1.5 r90; Mechanical 13 "5" at 14.375,32.98 h1.5 r90; Mechanical 13 "1" at 14.375,22.15 h1.5 r90; Top Overlay "1" at 14.224,22.098 h1.5 r90; Top Overlay "5" at 14.224,33.02 h1.5 r90; Top Overlay "9" at 4.975,31.595 h1.5 r90; Top Overlay "6" at 4.975,23.285 h1.5 r90
J2: Mechanical 13 "1" at 28.578,44.121 h1.5 r270; Mechanical 13 "13" at 27.686,4.826 h1.5; Mechanical 13 "14" at 38.078,43.615 h1.5 r270; Mechanical 13 "25" at 38.078,13.369 h1.5 r270; Top Overlay "25" at 38.078,13.316 h1.5 r270; Top Overlay "14" at 38.078,43.562 h1.5 r270; Top Overlay "13" at 28.578,11.81 h1.5 r270; Top Overlay "1" at 28.578,44.067 h1.5 r270
P7: Mechanical 13 "9" at 20.955,43.18 h0.7 r90; Mechanical 13 "10" at 17.78,43.18 h0.7 r90; Mechanical 13 "1" at 20.955,33.02 h0.7 r90; Mechanical 13 "2" at 17.78,33.02 h0.7 r90; Top Overlay "2" at 16.51,32.385 h1 r90; Top Overlay "9" at 22.86,42.545 h1 r90; Top Overlay "1" at 22.86,33.02 h1 r90; Top Overlay "10" at 16.51,42.545 h1 r90
U1: Mechanical 13 "1" at 16.002,6.223 h0.8 r90
U2: Mechanical 13 "1" at 15.494,19.177 h0.7 r90; Mechanical 15 "1" at 14.605,20.193 h0.7 r90
U3: Mechanical 13 "1" at 28.829,8.001 h0.6 r180
U4: Mechanical 13 "1" at 25.781,23.749 h0.6
U5: Mechanical 13 "1" at 25.781,37.719 h0.6
U7: Mechanical 13 "1" at 25.781,31.369 h0.6